# Altium PCB Pico-CRSF.PcbDoc
Units mil, origin at the board's own origin, x right, y up, seen from the top; angles counter-clockwise.
Board outline 1968.5 x 1968.5 mil, 2 copper layers (Top Layer, Bottom Layer), stack 38.189 mil thick; 44 components, 35 nets, 174 pads, 29 vias.
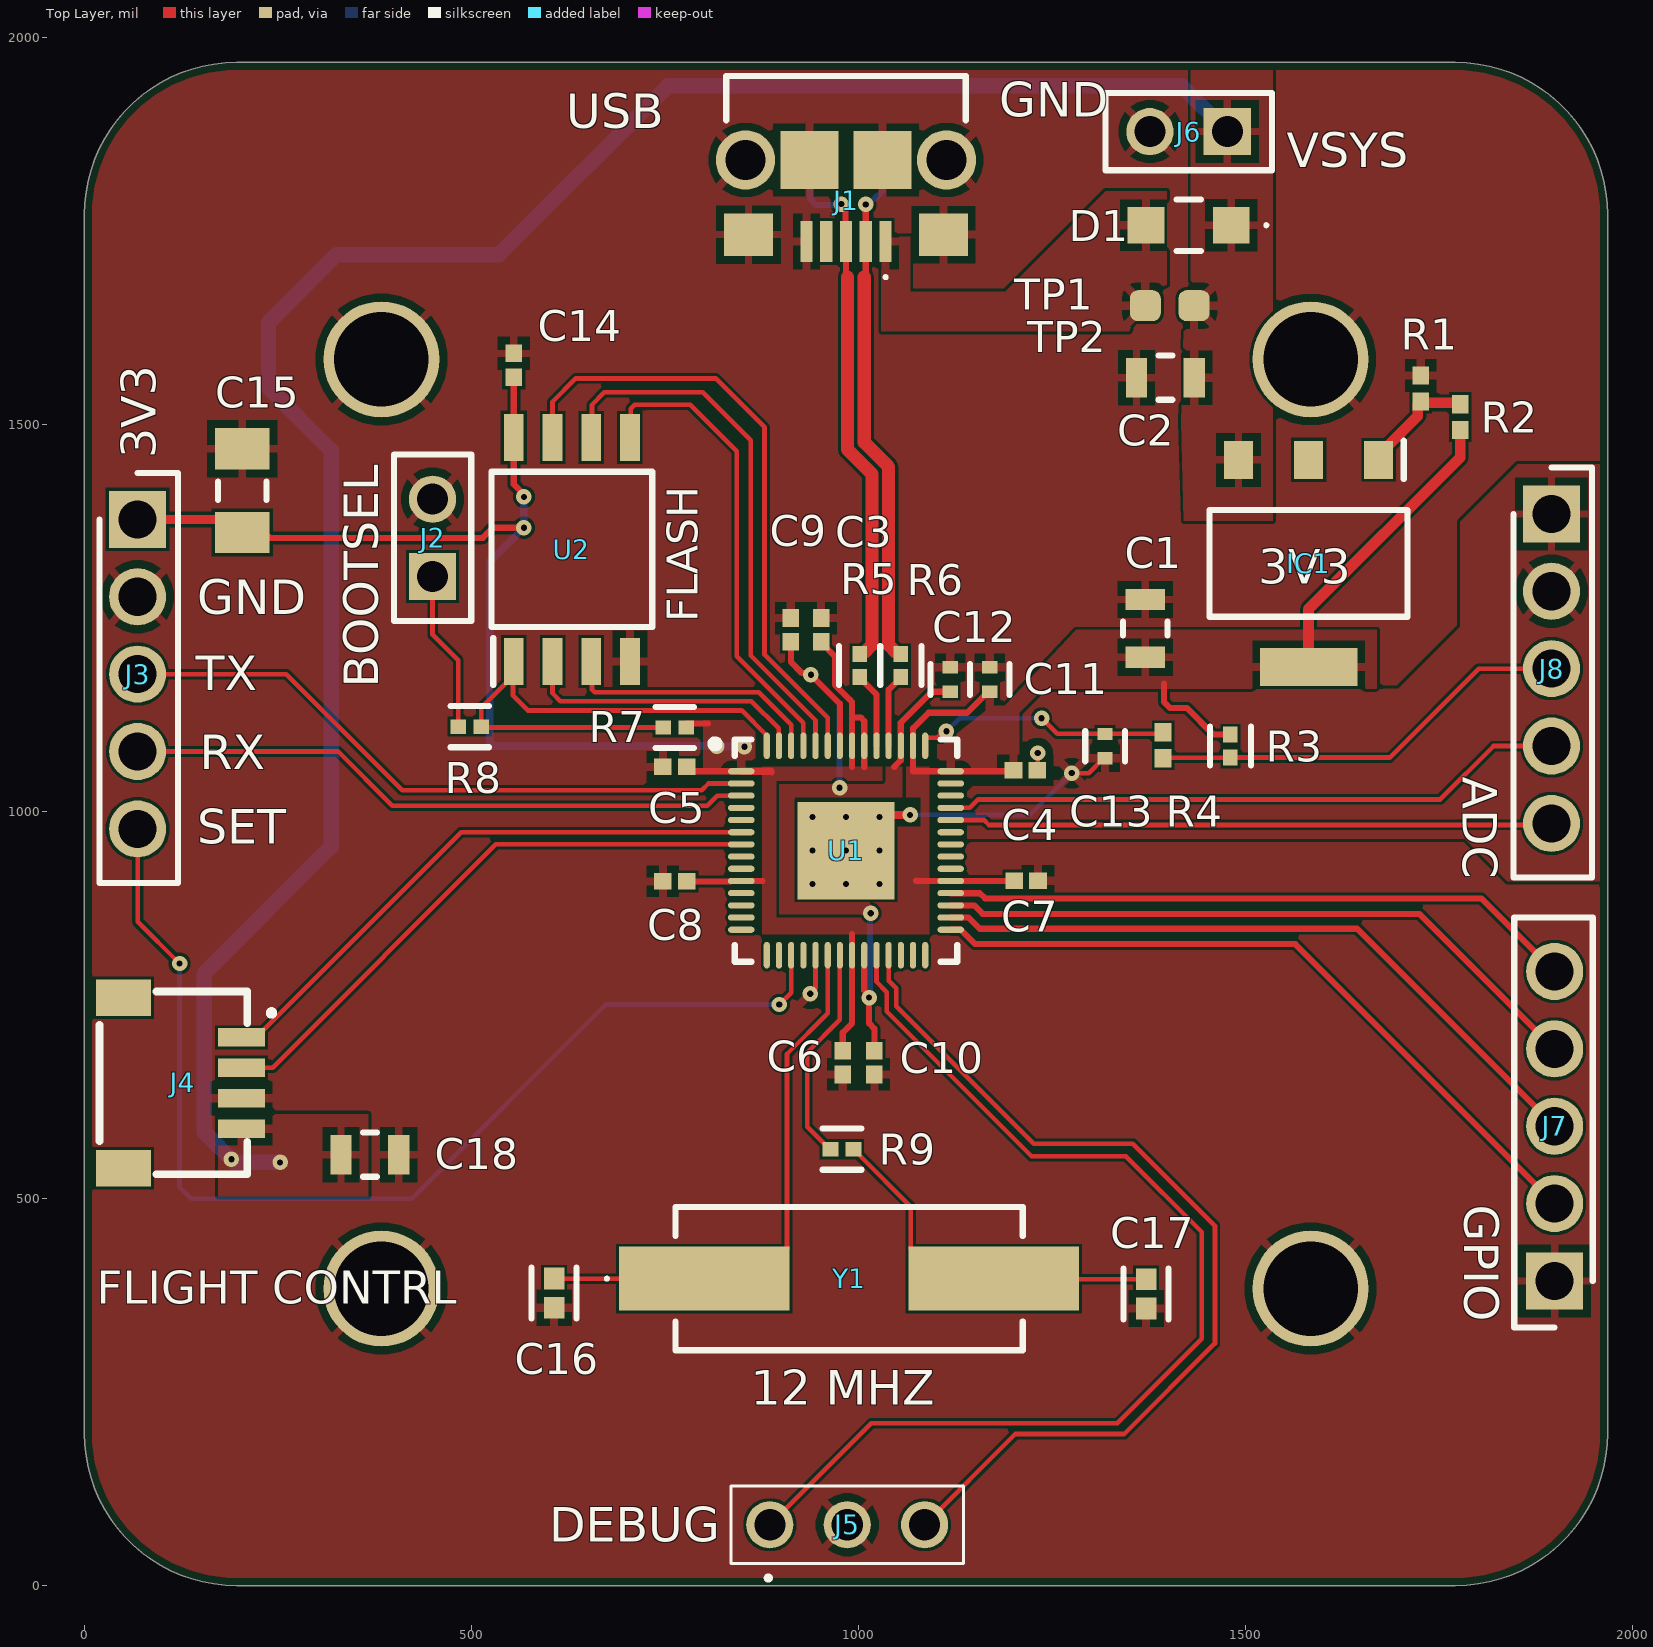
[diagram p0: Top Layer view]
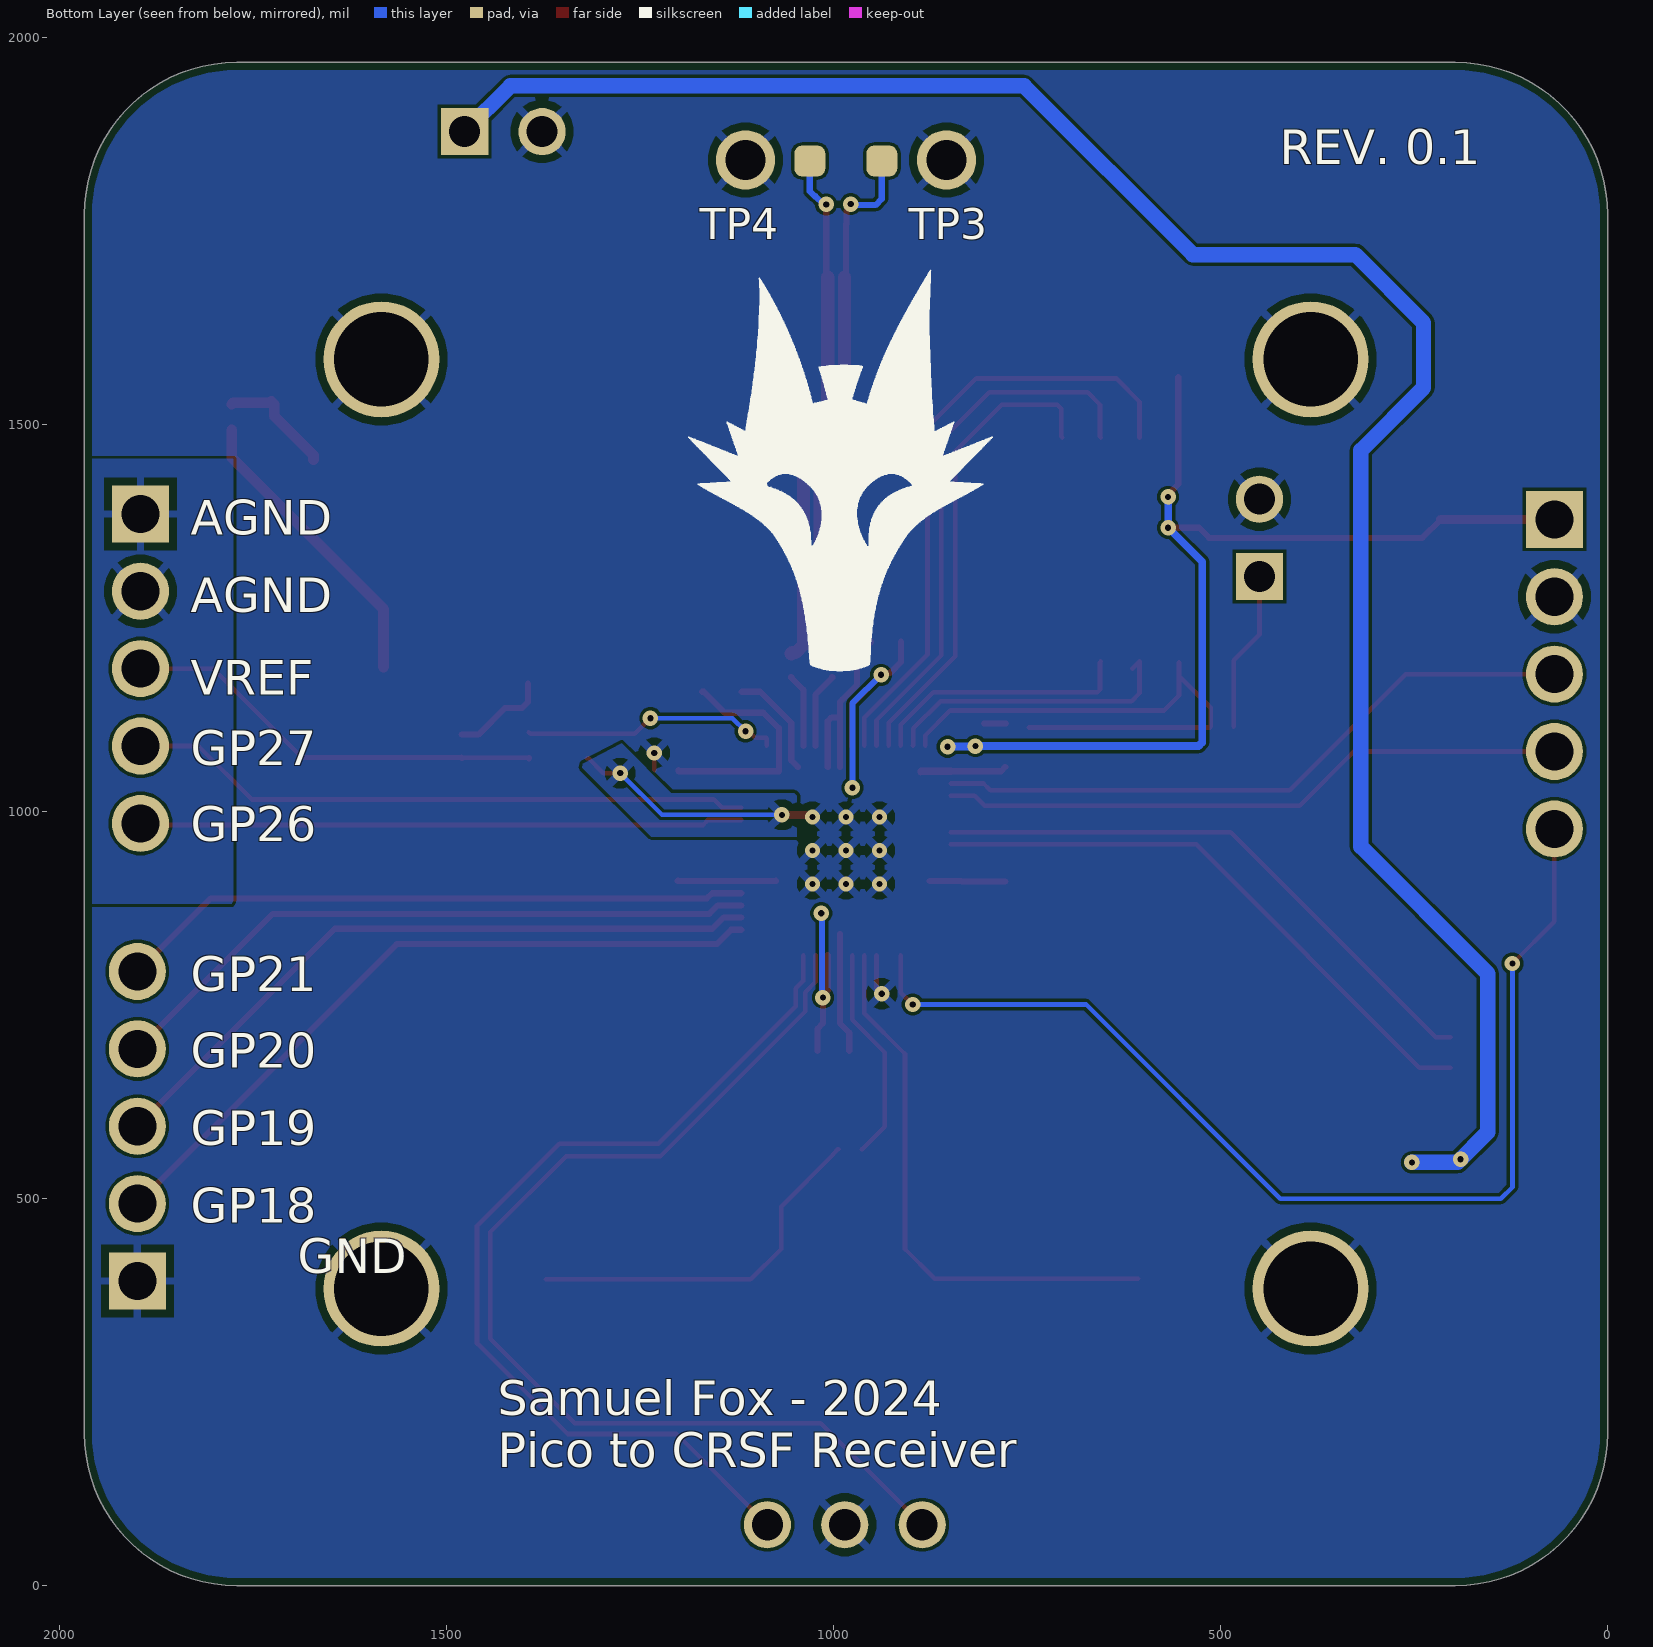
[diagram p1: Bottom Layer view, seen from below]
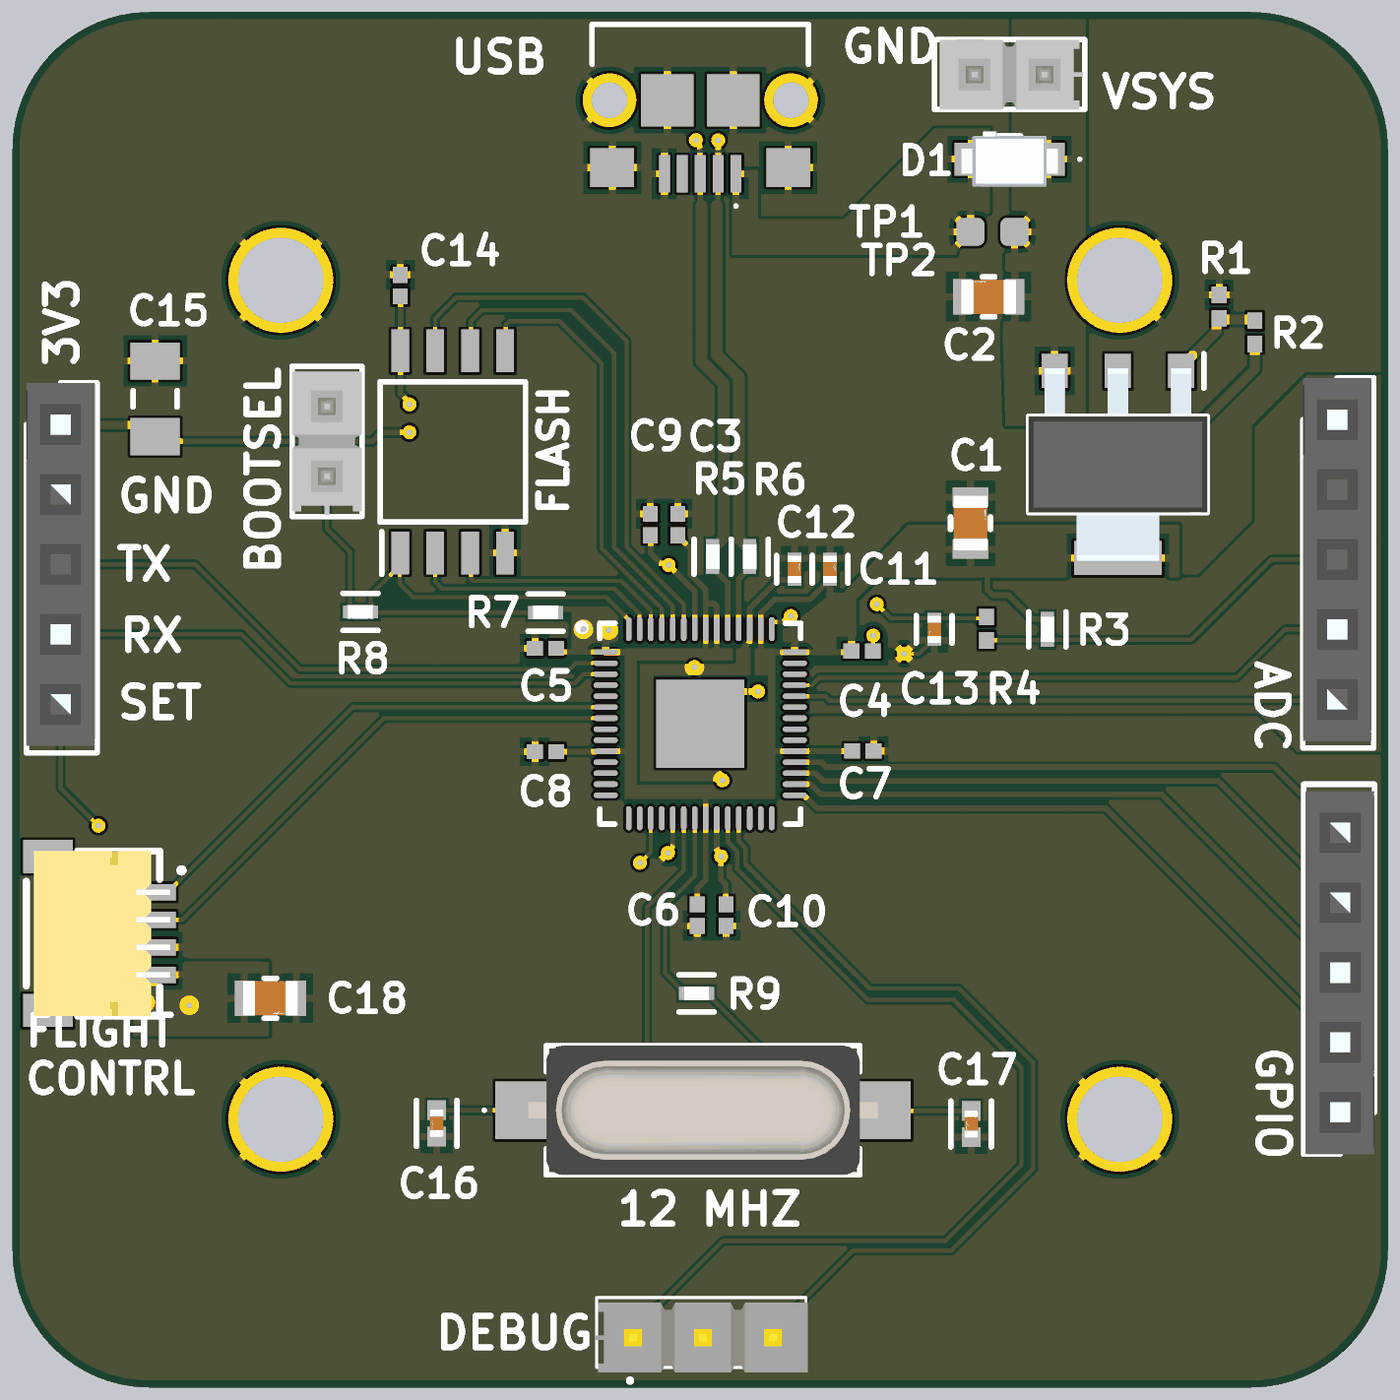
[diagram p2: 3D render of the assembled board from above, using the file's embedded part models]

## Layer stack, top to bottom
Top Solder: solder mask 0.4, Solder Resist, Dk 3.8
Top Layer: signal copper 1.378
Dielectric 1: dielectric 35.433, FR-4, Dk 4.5
Bottom Layer: signal copper 1.378
Bottom Solder: solder mask 0.4, Solder Resist, Dk 3.8

## Board outline
0,196.85 0,1771.65 cw(c196.85,1771.65) 196.85,1968.5 1771.65,1968.5 cw(c1771.65,1771.65) 1968.5,1771.65 1968.5,196.85 cw(c1771.65,196.85) 1771.65,0 196.85,0 cw(c196.85,196.85)

## Design rules (kind name [scope] priority, off if disabled: settings)
BoardOutlineClearance BoardOutlineClearance_1 [All] p1: gap=10 ignorepadtopadclearanceinfootprint=FALSE except(0: Arc-SplitContinuation Track-SplitContinuation SMDPad-SplitContinuation THPad-SplitContinuation Via-SplitContinuation Fill-SplitContinuation Poly-SplitContinuation Region-SplitContinuation Text-SplitContinuation)
Clearance Clearance_1 [OnMid vs OnMid] p1: gap=4 ignorepadtopadclearanceinfootprint=FALSE except(5: Arc-Arc Arc-Track Arc-SMDPad Arc-Text Track-Track Track-SMDPad Track-Text SMDPad-SMDPad SMDPad-Text Text-Text; 8: Arc-Via Track-Via SMDPad-Via THPad-Via Via-Via Via-Text; 10: Arc-Hole Track-Hole SMDPad-Hole THPad-Hole Via-Hole Fill-Hole Poly-Hole Region-Hole Text-Hole Hole-Hole; 15: Arc-THPad Track-THPad SMDPad-THPad THPad-Text; 20: THPad-THPad) sourcerule=45 cellrowname=All cellrowtype=0 cellcolname=All cellcoltype=0 innerlayers=TRUE
Clearance Clearance_2 [(ExistsOnLayer('Top Layer') Or ExistsOnLayer('Bottom Layer')) vs (ExistsOnLayer('Top Layer') Or ExistsOnLayer('Bottom Layer'))] p2: gap=4 ignorepadtopadclearanceinfootprint=FALSE except(5: Arc-Arc Arc-Track Arc-SMDPad Arc-Text Track-Track Track-SMDPad Track-Text SMDPad-SMDPad SMDPad-Text Text-Text; 8: Arc-Via Track-Via SMDPad-Via THPad-Via Via-Via Via-Text; 10: Arc-Hole Track-Hole SMDPad-Hole THPad-Hole Via-Hole Fill-Hole Poly-Hole Region-Hole Text-Hole Hole-Hole; 15: Arc-THPad Track-THPad SMDPad-THPad THPad-Text; 20: THPad-THPad) sourcerule=45 cellrowname=All cellrowtype=0 cellcolname=All cellcoltype=0 outerlayers=TRUE
Clearance [All] p3: gap=10 ignorepadtopadclearanceinfootprint=FALSE ismatrix=TRUE
DiffPairsRouting DifferentialPairsRouting_1 [InDifferentialPairClass('USB2.0')] p1: maxlimit=5 minlimit=5 mostfreqgap=5 toplayer_minwidth=16.87 toplayer_maxwidth=16.87 toplayer_prefwidth=16.87 bottomlayer_minwidth=16.87 bottomlayer_maxwidth=16.87 bottomlayer_prefwidth=16.87 impedanceprofiledriven=TRUE impedanceprofileid={F9BF6038-C2D3-4E47-A8B5-E0949A0A70E1} impedanceprofilevalue=90.000000 maxuncoupledlength=500
DiffPairsRouting "Schematic Differential Pairs Routing" [InDifferentialPairClass('All Differential Pairs')] p2: maxlimit=10 minlimit=5 mostfreqgap=5 toplayer_minwidth=5 toplayer_maxwidth=20 toplayer_prefwidth=15 bottomlayer_minwidth=5 bottomlayer_maxwidth=20 bottomlayer_prefwidth=15 maxuncoupledlength=500
DiffPairsRouting [All] p3: maxlimit=10 minlimit=5 mostfreqgap=5 toplayer_minwidth=5 toplayer_maxwidth=20 toplayer_prefwidth=15 bottomlayer_minwidth=5 bottomlayer_maxwidth=20 bottomlayer_prefwidth=15 maxuncoupledlength=500
HoleSize [All] p1: absolutevalues=TRUE maxlimit=248 minlimit=8 maxpercent=80.000 minpercent=20.000
HoleToHoleClearance [All] p1: gap=16 allowstackedmicrovias=TRUE
MinimumAnnularRing MinimumAnnularRing_1 [All] p1: minimumring=6
MinimumSolderMaskSliver [All] p1: minsoldermaskwidth=4
PolygonConnect PolygonConnectStyle_1 [InNetClass('UNREG-PWR')] p1: thpad.connectstyle=Relief thpad.reliefconductorwidth=10 thpad.reliefentries=4 thpad.polygonreliefangle="90 Angle" thpad.airgapwidth=10 thpad.conductorbypadedge=TRUE thpad.mindistance=15 thpad.enablemindistance=FALSE smdpad.connectstyle=Relief smdpad.reliefconductorwidth=10 smdpad.reliefentries=4 smdpad.polygonreliefangle="90 Angle" smdpad.airgapwidth=10 smdpad.conductorbypadedge=TRUE smdpad.mindistance=15 smdpad.enablemindistance=FALSE via.connectstyle=Direct via.reliefconductorwidth=10 via.reliefentries=4 via.polygonreliefangle="90 Angle" via.airgapwidth=10 via.conductorbypadedge=TRUE via.mindistance=15 via.enablemindistance=FALSE
PolygonConnect PolygonConnectStyle_2 [InNetClass('REG-PWR')] p2: thpad.connectstyle=Relief thpad.reliefconductorwidth=10 thpad.reliefentries=4 thpad.polygonreliefangle="90 Angle" thpad.airgapwidth=10 thpad.conductorbypadedge=TRUE thpad.mindistance=15 thpad.enablemindistance=FALSE smdpad.connectstyle=Relief smdpad.reliefconductorwidth=10 smdpad.reliefentries=4 smdpad.polygonreliefangle="90 Angle" smdpad.airgapwidth=10 smdpad.conductorbypadedge=TRUE smdpad.mindistance=15 smdpad.enablemindistance=FALSE via.connectstyle=Direct via.reliefconductorwidth=10 via.reliefentries=4 via.polygonreliefangle="90 Angle" via.airgapwidth=10 via.conductorbypadedge=TRUE via.mindistance=15 via.enablemindistance=FALSE
PolygonConnect [All] p3: connectstyle=Relief reliefconductorwidth=10 reliefentries=4 polygonreliefangle="90 Angle" conductorbypadedge=TRUE mindistance=15 enablemindistance=FALSE airgapwidth=10
RoomDefinition Pico-CRSF [InComponentClass('Pico-CRSF')] p1: confinementstyle=ConfineOut formatcopy=TRUE lockcomponents=FALSE outline 2100,-82 6319,-82 6319,1939 2100,1939
RoutingVias [All] p1: holewidth=8 width=20 viastyle="Through Hole" minholewidth=8 minwidth=20 maxholewidth=8 maxwidth=20
SilkToSolderMaskClearance [IsPad] p1: minsilkscreentomaskgap=6 clearancetoexposedcopper=TRUE
SolderMaskExpansion [All] p1: expansion=4 istentingtop=FALSE
Width "Schematic Width Constraint_1" [InNetClass('UNREG-PWR')] p1: maxlimit=20 minlimit=5 preferedwidth=6 minimp=50.000000 maximp=50.000000 favimp=50.000000
Width "Schematic Width Constraint" [InNetClass('REG-PWR')] p2: maxlimit=20 minlimit=5 preferedwidth=6 minimp=50.000000 maximp=50.000000 favimp=50.000000
Width [All] p3: maxlimit=20 minlimit=5 preferedwidth=6 minimp=50.000000 maximp=50.000000 favimp=50.000000
25 further rules are at their usual default settings.

## Classes and differential pairs
differential pair class USB2.0: D_USB-D
net class UNREG-PWR: VBUS VSYS
net class REG-PWR: 1V1_REG 3V3_REG
component class Pico-CRSF: C2 C3 C4 C5 C6 C7 C8 C9 C10 C11 C12 C13 C14 C15 C16 C17 C18 D1 IC1 J1 J2 J3 J4 J5 J6 J7 J8 R1 R3 R4 R5 R6 R7 R8 R9 TP1 TP2 TP3 TP4 Y1
differential pair D_USB-D: +USB-D_P -USB-D_N

## Components (designator, comment, footprint, x,y, rotation, side; value= is the part's Value field where it differs from the comment)
C1 "GRT21BR60J476ME13L" FP-GRT21B-0_2-MFG 1371,1237 r90 top value=47µF
C2 "GRT21BR60J476ME13L" FP-GRT21B-0_2-MFG 1397,1561 r180 top value=47µF
C3 "04026D104KAT2A" CAPC1005X56X25LL10T15 952,1235 r90 top value=0.1µF
C4 "04026D104KAT2A" CAPC1005X56X25LL10T15 1216,1054 r0 top value=0.1µF
C5 "04026D104KAT2A" CAPC1005X56X25LL10T15 763,1058 r180 top value=0.1µF
C6 "04026D104KAT2A" CAPC1005X56X25LL10T15 980,676 r270 top value=0.1µF
C7 "04026D104KAT2A" CAPC1005X56X25LL10T15 1217,911 r0 top value=0.1µF
C8 "04026D104KAT2A" CAPC1005X56X25LL10T15 763,910 r180 top value=0.1µF
C9 "04026D104KAT2A" CAPC1005X56X25LL10T15 913,1235 r90 top value=0.1µF
C10 "04026D104KAT2A" CAPC1005X56X25LL10T15 1021,676 r270 top value=0.1µF
C11 "GRM155D80J225ME95D" FP-GRM155-0_05-MFG 1170,1171 r90 top value=2.2µF
C12 "GRM155D80J225ME95D" FP-GRM155-0_05-MFG 1119,1171 r90 top value=2.2µF
C13 "GRM155D80J225ME95D" FP-GRM155-0_05-MFG 1319,1085 r270 top value=2.2µF
C14 "04026D104KAT2A" CAPC1005X56X25LL10T15 555,1577 r90 top value=0.1uF
C15 "CL31A107MQHNNNE" CAPC3216X16N 204,1415 r90 top value=100µF
C16 "GCM1555C1H300JA16D" FP-GCM155-0_05-IPC_A 607,378 r270 top value=30pF
C17 "GCM1555C1H300JA16D" FP-GCM155-0_05-IPC_A 1372,377 r270 top value=30pF
C18 "GRT21BR60J476ME13L" FP-GRT21B-0_2-MFG 369,557 r0 top value=47µF
D1 "PMEG2010ER,115" PMEG2010ER115 1427,1758 r180 top
IC1 "NCP1117ISTAT3G" SOT230P700X180-4N 1582,1321 r270 top
J1 "10118193-0001LF" 101181930001LF 984.25,1830.71 r180 top locked
J2 "TSW-102-26-G-S" SMTC-TSW-102-26-XX-S 450,1304 r90 top
J3 "2212S-05SG-85" RHDR5W74P0X254_1X5_1320X250X850P 68.9,1377.95 r270 top
J4 "SM04B-SRSS-TB_LF__SN_" SM04B-SRSS-TB(LFSN) 19.68,767.72 r270 top
J5 "TSW-103-26-G-S" TSW-103-XX-YY-S 885.83,78.74 r0 top
J6 "TSW-102-26-G-S" SMTC-TSW-102-26-XX-S 1477,1879 r180 top
J7 "2212S-05SG-85" RHDR5W74P0X254_1X5_1320X250X850P 1900,393.7 r90 top
J8 "2212S-05SG-85" RHDR5W74P0X254_1X5_1320X250X850P 1896,1385 r270 top
R1 "RC0402JR-07300RL" RESC1005X40X25NL05T10 1727,1547 r270 top value=330R
R2 "RC0402FR-07180RL" RESC1005X40X25NL05T10 1778,1510 r270 top value=200R
R3 "CR0402-FX-2000GLF" FP-CR0402-IPC_C 1481,1085 r270 top value=200R
R4 "RC0402FR-071R" RESC1005X40X25NL05T10 1394,1086 r90 top value=1.1R
R5 "CR0402-FX-27R0GLF" FP-CR0402-IPC_C 1002,1189 r270 top value=27R
R6 "CR0402-FX-27R0GLF" FP-CR0402-IPC_C 1055,1189 r270 top value=27R
R7 "CR0402AFX-1001GAS" FP-CR0402-IPC_C 763,1109 r0 top value=DNF
R8 "CR0402AFX-1001GAS" FP-CR0402-IPC_C 498,1110 r0 top value=1K
R9 "CR0402AFX-1001GAS" FP-CR0402-IPC_C 979,564 r180 top value=1K
TP1 "TestPoint" TestPoint-Footprint-1 1371,1654 r90 top
TP2 "TestPoint" TestPoint-Footprint-1 1434,1654 r90 top
TP3 "TestPoint" TestPoint-Footprint-1 938,1841 r90 bottom
TP4 "TestPoint" TestPoint-Footprint-1 1031,1841 r90 bottom
U1 "RP2040CT" QFN40P700X700X90_HS-57N 984.25,950 r0 top
U2 "S25FL128LAGMFI010" SOIC127P800X216-8N 630,1339 r90 top
Y1 "ABLS-12.000MHZ-B4-T" ABLS 988.25,396.7 r0 top

## Footprints (in the part's own frame and the unit in brackets; to place one, negate y for a bottom-side part, rotate by r counter-clockwise, add the part's x,y. Pads: shape width x height; smd on the part's side, far side on the other; paste and mask are expansions set on the pad)
101181930001LF [mm]
  rect 0.4x1.35 smd: 1(-1.3,2.38) 2(-0.65,2.38) 3(0,2.38) 4(0.65,2.38) 5(1.3,2.38)
  round 1.95 hole 1.3: MH1(-3.3,-0.295) MH2(3.3,-0.295)
  rect 1.6x1.4 smd: MP1(-3.2,2.155) MP2(3.2,2.155)
  rect 1.9x1.9 smd: MP3(-1.2,-0.295) MP4(1.2,-0.295)
  silkscreen extent -3.93,-3.06 3.93,3.6, body extent 94.07,-0.43 101.93,3.18, height 5.91
ABLS [mm]
  rect 5.6x2.1 smd: 1(-4.75,0) 2(4.75,0)
  silkscreen extent -8,-2.35 5.7,2.35, body extent -6.35,-2.35 6.35,2.35, height 4.2
CAPC1005X56X25LL10T15 [mm] "Chip Capacitor, 2-Leads, Body 1.00x0.50mm, IPC High Density"
  rect 0.58x0.54 smd: 1(-0.39,0) 2(0.39,0)
  body extent -0.55,-0.3 0.55,0.3, height 0.56
CAPC3216X16N [mm] "Chip Capacitor, 2-Leads, Body 3.20x1.60mm, IPC Medium Density"
  rect 1.35x1.8 smd: 1(-1.375,0) 2(1.375,0)
  silkscreen extent -0.3,-0.8 0.3,0.8, body extent -1.7,-0.9 1.7,0.9, height 1.6
FP-CR0402-IPC_C [mil]
  rect 20.29x18.6 smd paste+0 mask+0: 1(-14.9,0) 2(14.9,0)
  silkscreen extent -25,-27 25,27, body extent -29,-15 29,15, height 10
FP-GCM155-0_05-IPC_A [mil]
  rect 28.16x26.48 smd paste+0 mask+0: 1(-18.84,0) 2(18.84,0)
  silkscreen extent -33,-29 33,29, body extent -41,-21 41,21, height 10
FP-GRM155-0_05-MFG [mm]
  rect 0.4x0.5 smd paste+0 mask+0: 1(-0.4,0) 2(0.4,0)
  silkscreen extent -0.5,-0.65 0.5,0.65, body extent -0.7,-0.38 0.7,0.38, height 0.25
FP-GRT21B-0_2-MFG [mm]
  rect 0.7x1.3 smd paste+0 mask+0: 1(-0.95,0) 2(0.95,0)
  silkscreen extent -0.23,-0.72 0.23,0.72, body extent -1.4,-0.82 1.4,0.82, height 0.25
PMEG2010ER115 [mm]
  rect 1.2x1.2 smd: 1(-1.4,0) 2(1.4,0)
  silkscreen extent -2.6,-0.85 0.4,0.85, body extent -1.75,-1 1.75,1, height 1.07
QFN40P700X700X90_HS-57N [mm] "QFN, 56-Leads, Body 7.00x7.00mm, Pitch 0.40mm, Thermal Pad 3.20x3.20mm, IPC Medium Density"
  oval 0.875x0.2 smd: 1(-3.437,2.6) 2(-3.437,2.2) 3(-3.437,1.8) 4(-3.437,1.4) 5(-3.437,1) 6(-3.437,0.6) 7(-3.437,0.2) 8(-3.437,-0.2) 9(-3.437,-0.6) 10(-3.437,-1) 11(-3.437,-1.4) 12(-3.437,-1.8) 13(-3.437,-2.2) 14(-3.437,-2.6) 29(3.438,-2.6) 30(3.438,-2.2) 31(3.438,-1.8) 32(3.438,-1.4) 33(3.438,-1) 34(3.438,-0.6) 35(3.438,-0.2) 36(3.438,0.2) 37(3.438,0.6) 38(3.438,1) 39(3.438,1.4) 40(3.438,1.8) 41(3.438,2.2) 42(3.438,2.6)
  oval 0.2x0.875 smd: 15(-2.6,-3.438) 16(-2.2,-3.438) 17(-1.8,-3.438) 18(-1.4,-3.438) 19(-1,-3.438) 20(-0.6,-3.438) 21(-0.2,-3.438) 22(0.2,-3.438) 23(0.6,-3.438) 24(1,-3.438) 25(1.4,-3.438) 26(1.8,-3.438) 27(2.2,-3.438) 28(2.6,-3.438) 43(2.6,3.437) 44(2.2,3.437) 45(1.8,3.437) 46(1.4,3.437) 47(1,3.437) 48(0.6,3.437) 49(0.2,3.437) 50(-0.2,3.437) 51(-0.6,3.437) 52(-1,3.437) 53(-1.4,3.437) 54(-1.8,3.437) 55(-2.2,3.437) 56(-2.6,3.437)
  rect 3.2x3.2 smd: 57(0,0)
  silkscreen extent -4.42,-3.65 3.65,3.65, body extent -3.5,-3.5 3.5,3.5, height 0.9
RESC1005X40X25NL05T10 [mm] "Chip Resistor, 2-Leads, Body 1.00x0.50mm, IPC Medium Density"
  rect 0.6x0.55 smd: 1(-0.425,0) 2(0.425,0)
  body extent -0.53,-0.27 0.53,0.28, height 0.4
RHDR5W74P0X254_1X5_1320X250X850P [mm]
  rect 1.875x1.875 hole 1.25: 1(0,0)
  round 1.875 hole 1.25: 2(2.54,0) 3(5.08,0) 4(7.62,0) 5(10.16,0)
  silkscreen extent -1.52,-1.25 11.93,1.33, body extent -1.52,-1.25 11.68,1.25, height 8.5
SM04B-SRSS-TB(LFSN) [mm]
  rect 0.6x1.55 smd: 1(1.5,4.661) 2(2.5,4.661) 3(3.5,4.661) 4(4.5,4.661)
  rect 1.2x1.8 smd: 5(0.2,0.786) 6(5.8,0.786)
  silkscreen extent 0,0 6,5.7, body extent 0,0.28 6,5.23, height 2.97
SMTC-TSW-102-26-XX-S [mm] ".025 SQ Post Terminal Strip Assembly, 1x2 Pins, Vertical, 2.54mm Pitch, Male"
  rect 1.55x1.55 hole 1.02: 1(0,0)
  round 1.55 hole 1.02: 2(2.54,0)
  silkscreen extent -1.46,-1.27 4,1.27, body extent -1.4,-1.27 3.81,1.27, height 8.38
SOIC127P800X216-8N [mm]
  rect 1.55x0.65 smd: 1(-3.675,1.905) 2(-3.675,0.635) 3(-3.675,-0.635) 4(-3.675,-1.905) 5(3.675,-1.905) 6(3.675,-0.635) 7(3.675,0.635) 8(3.675,1.905)
  silkscreen extent -4.45,-2.64 2.55,2.64
SOT230P700X180-4N [mm]
  rect 1.25x0.95 smd: 1(-3.4,2.3) 2(-3.4,0) 3(-3.4,-2.3)
  rect 1.25x3.2 smd: 4(3.4,0)
  silkscreen extent -4.03,-3.25 1.75,3.25, body extent -3.5,-3.25 3.5,3.25, height 1.8
TestPoint-Footprint-1 [mil]
  rrect50% 40x40 smd: 1(0,0)
TSW-103-XX-YY-S [mm]
  round 1.55 hole 1.02: 1(0,0) 2(2.54,0) 3(5.08,0)
  silkscreen extent -1.27,-1.8 6.35,1.27, body extent -1.34,-1.46 6.41,1.08, height 5.21

## Part data
C1 C2 C18: library part CMP-001-00084-1, "Ceramic Capacitor, Multilayer, Ceramic, 6.3V, 20% +Tol, 20% -Tol, X5R, 15% TC, 47uF, Surface Mount, 0805", Capacitor Type=Ceramic, Case/Package=0805, Max Operating Temperature=85°C, Min Operating Temperature=-55°C, Mounting Technology="Surface Mount", Pins=2, RoHS Compliant=Yes
C3 C4 C5 C6 C7 C8 C9 C10 C14: library part CMP-001-00085-1, "Ceramic Capacitor, Multilayer, Ceramic, 6.3V, 10% +Tol, 10% -Tol, X5R, 15% TC, 0.1uF, Surface Mount, 0402", Capacitor Type=Ceramic, Case/Package=0402, Max Operating Temperature=85°C, Min Operating Temperature=-55°C, Mounting Technology="Surface Mount", Pins=2, RoHS Compliant=Yes
C11 C12 C13: library part CMP-001-00086-1, "Ceramic Capacitor, Multilayer, Ceramic, 6.3V, 20% +Tol, 20% -Tol, X6T, -33/+22% TC, 2.2uF, Surface Mount, 0402", Capacitor Type=Ceramic, Case/Package=0402, Max Operating Temperature=105°C, Min Operating Temperature=-55°C, Mounting Technology="Surface Mount", Pins=2, RoHS Compliant=Yes
C15: library part CMP-001-00089-1, "Ceramic Capacitor, Multilayer, Ceramic, 6.3V, 20% +Tol, 20% -Tol, X5R, 15% TC, 100uF, Surface Mount, 1206", Capacitor Type=Ceramic, Case/Package=1206, Max Operating Temperature=85°C, Min Operating Temperature=-55°C, Mounting Technology="Surface Mount", Pins=2, RoHS Compliant=Yes
C16 C17: library part CMP-001-00088-1, "Ceramic Capacitor, Multilayer, Ceramic, 50V, 5% +Tol, 5% -Tol, C0G, 30ppm/Cel TC, 0.00003uF, Surface Mount, 0402", Capacitor Type=Ceramic, Case/Package=0402, Max Operating Temperature=125°C, Min Operating Temperature=-55°C, Mounting Technology="Surface Mount", Pins=2, RoHS Compliant=Yes
D1: "Schottky Diode", Manufacturer_Name=Nexperia, Mouser Part Number=771-PMEG2010ER115, Arrow Part Number=PMEG2010ER,115, Arrow Price/Stock=https://www.arrow.com/en/products/pmeg2010er115/nexperia?region=nac, Datasheet Link=https://assets.nexperia.com/documents/data-sheet/PMEG2010ER.pdf, Height=1.1mm, Manufacturer_Part_Number=PMEG2010ER,115, Mouser Price/Stock=https://www.mouser.co.uk/ProductDetail/Nexperia/PMEG2010ER115?qs=LMSg3oBIm%2FjLN28PGE8ULg%3D%3D
IC1: "Integrated Circuit", Manufacturer_Name=onsemi, Mouser Part Number=863-NCP1117ISTAT3G, Datasheet Link=https://www.mouser.in/datasheet/2/308/NCP1117_D-2307187.pdf, Height=1.8mm, Manufacturer_Part_Number=NCP1117ISTAT3G, Mouser Price/Stock=https://www.mouser.co.uk/ProductDetail/onsemi/NCP1117ISTAT3G?qs=iLbezkQI%252Bsivw9bUuD01vA%3D%3D
J1: "Connector", Manufacturer_Name="Amphenol Communications Solutions", Datasheet Link=https://cdn.amphenol-cs.com/media/wysiwyg/files/drawing/10118193.pdf, Height=3.3mm, Manufacturer_Part_Number=10118193-0001LF
J2 J6: library part CMP-1024-00327-1, "0.025\" SQ Post Header, Through-hole, Vertical, -55 to 125 degC, 2.54 mm Pitch, 2-Pin, Male, RoHS", Manufacturer=Samtec, Temperature Range="-55 to 125 degC", ComponentLink1Description="Manufacturer URL", ComponentLink1URL=http://www.samtec.com, ComponentLink2Description=Datasheet, ComponentLink2URL=http://www.samtec.com/documents/webfiles/pdf/TSW_TH.PDF, ComponentLink3Description="Package Specification", ComponentLink3URL=http://www.samtec.com/documents/webfiles/cpdf/TSW-XXX-XX-XXX-X-XX-XXX-MKT.pdf, DatasheetVersion=F-214, Mounting Technology=Through-hole, Orientation=Vertical, PackageDescription=".025[0.64] SQ. Post Terminal Strip Assembly", PackageReference=TSW-102-26-XX-S, PackageVersion="DM, 8/1988", PartNumber=TSW-102-26-G-S, Pitch="2.54 mm", RoHS=True
J3 J7 J8: "Connector", Manufacturer_Name="Multicomp Pro", Datasheet Link=https://componentsearchengine.com/Datasheets/2/2212S-05SG-85.pdf, Height=8.5mm, Manufacturer_Part_Number=2212S-05SG-85
J4: "Connector", Arrow Part Number=SM04B-SRSS-TB(LF)(SN), Manufacturer_Name="JST (JAPAN SOLDERLESS TERMINALS)", Arrow Price/Stock=https://www.arrow.com/en/products/sm04b-srss-tb-lf-sn/jst-manufacturing?region=europe, Datasheet Link=http://www.jst-mfg.com/product/pdf/eng/eSH.pdf, Manufacturer_Part_Number=SM04B-SRSS-TB(LF)(SN)
J5: "Connector", Manufacturer_Name=SAMTEC, Datasheet Link=http://suddendocs.samtec.com/prints/tsw-xxx-xx-xxx-x-xx-xxx-mkt.pdf, Manufacturer_Part_Number=TSW-103-26-G-S
R1: library part CMP-009-00179-1, "Fixed Resistor, Metal Glaze/thick Film, 0.0625W, 300ohm, 50V, 5% +/-Tol, 100ppm/Cel, Surface Mount, 0402", Case/Package=0402, Max Operating Temperature=155°C, Min Operating Temperature=-55°C, Power=62.5mW, Tolerance=5%, Mounting Technology="Surface Mount", Pins=2, RoHS Compliant=Yes
R2: library part CMP-009-00178-1, "Fixed Resistor, Metal Glaze/thick Film, 0.0625W, 180ohm, 50V, 1% +/-Tol, 100ppm/Cel, Surface Mount, 0402", Case/Package=0402, Max Operating Temperature=155°C, Min Operating Temperature=-55°C, Power=62.5mW, Tolerance=1%, Mounting Technology="Surface Mount", Pins=2, RoHS Compliant=Yes
R3: library part CMP-009-00180-1, "Fixed Resistor, Metal Glaze/thick Film, 0.0625W, 200ohm, 50V, 1% +/-Tol, 100ppm/Cel, Surface Mount, 0402", Case/Package=0402, Max Operating Temperature=125°C, Min Operating Temperature=-55°C, Power=62.5mW, Tolerance=1%, Mounting Technology="Surface Mount", Pins=2, RoHS Compliant=Yes
R4: library part CMP-009-00181-1, "Fixed Resistor, Metal Glaze/thick Film, 0.0625W, 1.1ohm, 50V, 1% +/-Tol, 200ppm/Cel, Surface Mount, 0402", Case/Package=0402, Max Operating Temperature=155°C, Min Operating Temperature=-55°C, Power=62.5mW, Tolerance=1%, Mounting Technology="Surface Mount", Pins=2, RoHS Compliant=Yes
R5 R6: library part CMP-009-00182-1, "Fixed Resistor, Metal Glaze/thick Film, 0.0625W, 27ohm, 50V, 1% +/-Tol, 100ppm/Cel, Surface Mount, 0402", Case/Package=0402, Max Operating Temperature=125°C, Min Operating Temperature=-55°C, Power=62.5mW, Tolerance=1%, Mounting Technology="Surface Mount", Pins=2, RoHS Compliant=Yes
R7 R8 R9: library part CMP-009-00177-1, "Fixed Resistor, Metal Glaze/thick Film, 0.063W, 1000ohm, 50V, 1% +/-Tol, 100ppm/Cel, Surface Mount, 0402"
TP1 TP2 TP3 TP4: library part CMP-00030-00001-2, "Test point for circuit testing."
U1: library part CMP-020-00023-1, "RASPBERRY-PI RP2040CT", Case/Package=QFN-56, Clock Frequency=12MHz, Frequency=133MHz, Mounting Technology=SMD, Pins=56
U2: library part CMP-007-000000-1, "CYPRESS SEMICONDUCTOR - S25FL128LAGMFI010 - FLASH MEMORY, 128MBIT, 133MHZ, SOIC-8", Manufacturer_Name=Infineon, Datasheet Link=http://www.cypress.com/file/316171/download, Design Item ID=S25FL128LAGMFI010, Geometry.Height=2.16mm, Manufacturer_Part_Number=S25FL128LAGMFI010, Source=S25FL128LAGMFI010.SchLib
Y1: "Crystal or Oscillator", Manufacturer_Name=ABRACON, Mouser Part Number=815-ABLS-12.0M-T, Arrow Part Number=ABLS-12.000MHZ-B4-T, Arrow Price/Stock=https://www.arrow.com/en/products/abls-12.000mhz-b4-t/abracon?region=europe, Datasheet Link=https://abracon.com/Resonators/abls.pdf, Manufacturer_Part_Number=ABLS-12.000MHZ-B4-T, Mouser Price/Stock=https://www.mouser.co.uk/ProductDetail/ABRACON/ABLS-12.000MHZ-B4-T?qs=yTU0IcKoRlGSQ8ooxPPVnQ%3D%3D

## Free pads (board coordinates)
  round 150 hole 122.05: MH1(383.86,1584.65) MH2(1584.65,1584.65) MH3(1584.65,383.86) MH4(383.86,383.86)

## Via types
v1: diameter 20, hole 8, Top Layer to Bottom Layer, 20 vias
v2: diameter 19.68, hole 7.87, Top Layer to Bottom Layer, 9 vias

## Nets (pads, with @x,y where several pads share a name; then routed paths per layer and width w, separated by ;. In a path a pad name is that pad's centre, name@x,y a point inside that pad or via, vN(x,y) a via of type N, cw(c..) or ccw(c..) an arc to the next point about the centre after c; other vN are vias at no path point)
1V1_REG: C9.1 C10.1 C12.1 U1.23 U1.45 U1.50 | length 707.2
  Top Layer w8: C9.1 913,1193.69 927.39,1179.3 936.7,1179.3 976.38,1139.62 U1.50 ; U1.23 1007.87,769.5 1014.13,763.25 v1(1014.13,760) 1014,759.87 1014,726.8 1021,719.8 C10.1 ; 1046.61,1058 1055.06,1066.45 U1.45 U1.45 1055.12,1115.12 1095.25,1155.25 C12.1
  Bottom Layer w8: v1(939,1177) 976,1140 v1(976,1030.99) ; v1(1014.13,760) 1015.13,761 1015.13,867.88 v1(1016.25,869.01)
3V3_REG: C1.1 C3.1 C4.1 C5.1 C6.1 C7.1 C8.1 C11.1 C14.1 C15.1 IC1.4 J3.1 R2.2 R3.1 R7.2 U1.1 U1.10 U1.22 U1.33 U1.42 U1.44 U1.48 U1.49 U2.8 | length 2939.5
  Top Layer w8: J3.1 J3.1@69.25,1377.6 ; C15.1@215.81,1377.6 239.41,1354 515,1354 528,1367 v1(568,1367) ; C14.1 U2.8 555,1423.25 568,1410.25 v1(568,1407) ; R7.2@777.9,1114 806,1114 ; C8.1 835.13,910 835.76,910.63 U1.10 876.41,910.63 ; C5.1 783.93,1052.43 U1.1 U1.1 ; 886.64,1052.36 888,1051 ; C3.1 952,1218.86 970,1200.86 970,1164.38 989.38,1145.01 989.38,1144.56 992.13,1141.82 992.13,1122 ; C6.1 980,714.77 992.13,726.9 U1.22 992.13,842.16 ; 992.13,1057.84 U1.49 992.13,1122 ; 1007.87,1057.84 U1.48 1007.87,1117.31 1003.19,1122 992.13,1122 ; 1075,911 1075,910.63 U1.33 1201.65,910.63 C7.1 ; C11.1 1168.03,1155.25 1140.78,1128 1091,1128 1070.93,1107.93 1070.93,1085.4 U1.44 1070.87,1052.36 U1.42 1200.65,1052.36 C4.1 ; 1395,1166 1395,1142 1403,1134 1425,1134 1459.1,1099.9 R3.1
  Top Layer w10: U1.1 886.64,1052.36
  Top Layer w12: J3.1@69.25,1377.6 C15.1@215.81,1377.6
  Top Layer w14: IC1.4 1582,1262 1778,1458 R2.2
  Bottom Layer w10: v1(568,1407) v1(568,1367) 524,1323 524,1089.69 528.69,1085 v1(817,1085) 817.5,1084.5 852.5,1084.5 v1(853,1084)
ADC_AVDD: C13.1 R4.2 U1.43 | length 336.9
  Top Layer w6: U1.43 1086.61,1094.76 1087.48,1095.62 1101.83,1095.62 1110.21,1104 v1(1114,1104) ; v1(1237,1121) 1257.25,1100.75 1392.02,1100.75 R4.2
  Bottom Layer w6: v1(1114,1104) 1131,1121 v1(1237,1121)
ADC_VREF: J8.3 R3.2 R4.1 | length 549.9
  Top Layer w6: R4.1@1394.41,1069.68 R3.2@1480.59,1069.68 ; R3.2 1687.1,1070.1 1802,1185 J8.3
  Top Layer w8: R4.1 R4.1@1394.41,1069.68 ; R3.2@1480.59,1069.68 R3.2
ADJ_REF: IC1.1 R1.2 R2.1 | length 150.4
  Top Layer w14: IC1.1 1672.55,1460.76 1723.17,1511.39 1723.17,1526.44 R1.2 1728.77,1528.5 1776.23,1528.5 R2.1
CRSF_RX: J4.2 U1.7 | length 765.3
  Top Layer w6: J4.2 243.29,669.29 531.87,957.87 U1.7
CRSF_TX: J4.1 U1.6 | length 755.5
  Top Layer w6: J4.1 221.89,708.66 486.85,973.62 U1.6
GND: C1.2 C2.2 C3.2 C4.2 C5.2 C6.2 C7.2 C8.2 C9.2 C10.2 C11.2 C12.2 C13.2 C14.2 C15.2 C16.2 C17.2 C18.2 J1.5 J1.MH1 J1.MH2 J1.MP1 J1.MP2 J1.MP3 J1.MP4 J2.2 J3.2 J4.3 J5.2 J6.2 J7.1 J8.1 J8.2 pad.MH1 pad.MH2 pad.MH3 pad.MH4 R1.1 U1.19 U1.57 U2.4 | length 397.7
  Top Layer w6: v1(938,765) 944.88,771.88 U1.19 ; C4.2 1232,1054.65 v1(1232,1076) ; v1(1276,1050) 1297.78,1050 1317.03,1069.25 C13.2
  Top Layer w10: v2(1027.56,993.31) 1030.25,996 v1(1067,996)
  Bottom Layer w6: v1(1067,996) 1222,996 v1(1276,1050)
  other v2: 940.95,906.69 984.25,906.69 1027.56,906.69 940.95,950 984.25,950 1027.56,950 940.95,993.31 984.25,993.31
GPIO18: J7.2 U1.29 | length 927
  Top Layer w8: U1.29 1132.75,847.64 1151.39,829 1564.7,829 J7.2
GPIO19: J7.3 U1.30 | length 892.1
  Top Layer w8: U1.30 1142.61,863.39 1157,849 1644.7,849 J7.3
GPIO20: J7.4 U1.31 | length 856.8
  Top Layer w8: U1.31 1149.87,879.13 1161,868 1725.31,868 J7.4@1899.61,693.7
GPIO21: J7.5 U1.32 | length 821.9
  Top Layer w8: U1.32 1157.12,894.88 1164,888 1805.31,888 J7.5@1899.61,793.7
GPIO26: J8.5 U1.38 | length 779.9
  Top Layer w6: U1.38 1162.63,989.37 1169,983 1894,983 J8.5
GPIO27: J8.4 U1.39 | length 809.5
  Top Layer w6: U1.39 1144.12,1005.12 1155,1016 1752,1016 1821,1085 J8.4
HC12_RX: J3.4 U1.3 | length 814.3
  Top Layer w6: J3.4 328.05,1077.95 398,1008 805,1008 817.87,1020.87 U1.3
HC12_SET: J3.5 U1.17 | length 1440.6
  Top Layer w6: J3.5 68.9,858.1 v1(123,804) ; v1(898,751) 913.39,766.39 U1.17
  Bottom Layer w6: v1(123,804) 123,515 138,500 423,500 674,751 v1(898,751)
HC12_TX: J3.3 U1.2 | length 845.7
  Top Layer w6: J3.3 261.05,1177.95 411,1028 798,1028 806.61,1036.61 U1.2
NetC17_1: C17.1 R9.1 Y1.2 | length 480.4
  Top Layer w6: R9.1 994.75,564 1001.05,557.7 1001.05,556.86 1068.02,489.88 1068.02,435.04 1107.22,395.84 C17.1
QSPI_CSn: R7.1 R8.2 U1.56 U2.1 | length 724
  Top Layer w6: U2.1@554,1193.32 U2.1@554,1175.6 ; R7.1 513.9,1109 R8.2 512.9,1134.5 U2.1@554,1175.6 ; U1.56 881.89,1098.62 849.51,1131 573,1131 554,1150 U2.1@554,1175.6
QSPI_SCLK: U1.52 U2.6 | length 709.4
  Top Layer w6: U2.6 656,1484.68 656,1526 672,1542 799,1542 861,1480 861,1202 944.88,1118.12 U1.52
QSPI_SD0: U1.53 U2.5 | length 618
  Top Layer w6: U2.5 706,1484.68 706,1521 711,1526 783,1526 843,1466 843,1201 929.13,1114.87 U1.53
QSPI_SD1: U1.55 U2.2 | length 387.9
  Top Layer w6: U2.2@614.23,1185.08 U2.2 605,1153 615,1143 862,1143 897.28,1107.72 897.28,1085.69 U1.55
QSPI_SD2: U1.54 U2.3 | length 340.2
  Top Layer w6: U2.3 656,1193.32 656,1158 659.5,1154.5 871.5,1154.5 913.39,1112.61 U1.54
QSPI_SD3: U1.51 U2.7 | length 804.3
  Top Layer w6: U2.7 605,1530 635,1560 816,1560 879,1497 879,1203 960.63,1121.37 U1.51
SWCLK: J5.1 U1.24 | length 1398.9
  Top Layer w6: J5.1 1017.09,210 1335,210 1444,319 1444,457 1346,555 1224,555 1037,742 1037,766.82 1023.62,780.2 U1.24
SWD: J5.3 U1.25 | length 1223.5
  Top Layer w6: U1.25 1039.37,781.42 1049,771.79 1049,749 1227,571 1355,571 1461,465 1461,313 1344,196 1203.09,196 J5.3
USB-D_N: J1.2 R6.1 TP4.1 | length 671.5
  Top Layer w8: 1007.87,1691 1009.84,1692.97 J1.2 1009.89,1737.06 v1(1009.89,1784.92)
  Top Layer w16.87: 1007.87,1691 1007.87,1477.36 1039.43,1445.79 1039.43,1215.5 1049.32,1205.61 1054.13,1205.61 1055,1204.75 R6.1
  Bottom Layer w8: v1(1009.89,1784.92) 1013.14,1784.92 1023.79,1795.57 1024.7,1795.57 1031,1801.86 TP4.1
USB-D_NX: R6.2 U1.46 | length 95.2
  Top Layer w8: U1.46 1039.37,1157.62 1055,1173.25 R6.2
USB-D_P: J1.3 R5.1 TP3.1 | length 699.9
  Top Layer w8: v1(978,1785.25) 978,1782 983.77,1776.23 983.77,1759.58 984.15,1759.21 984.25,1759.21 984.25,1692.75 986,1691
  Top Layer w16.87: 986,1691 986,1468.3 1017.57,1436.73 1017.57,1215.5 1007.68,1205.61 1002.87,1205.61 1002,1204.75 R5.1
  Bottom Layer w8: TP3.1 938,1792 946,1784 976.75,1784 v1(978,1785.25)
USB-D_PX: R5.2 U1.47 | length 97.7
  Top Layer w8: R5.2 1002,1173.25 1023.62,1151.63 U1.47
USB_BOOTn: J2.1 R8.1 | length 207.7
  Top Layer w6: J2.1 450,1229 483.1,1195.9 R8.1
VBUS: D1.2 J1.1 TP1.1
VSYS: C2.1 C18.1 D1.1 IC1.3 J4.4 J6.1 TP2.1 | length 2651.8
  Bottom Layer w20: v1(253,547) 194,547 155,586 155,791 319,955 319,1467 238,1548 238,1632 326,1720 536,1720 754,1938 1418,1938 J6.1
  other v1: 190,551
XIN: C16.1 U1.20 Y1.1 | length 718.4
  Top Layer w6: C16.1 607.14,396.7 Y1.1 869.66,396.7 908,435.04 908,687 960.63,739.63 U1.20
XOUT: R9.2 U1.21 | length 281.2
  Top Layer w6: R9.2 963.25,564 934,593.25 934,689 976.38,731.38 U1.21
pads on no net: IC1.2 J1.4 J4.5 J4.6 U1.4 U1.5 U1.8 U1.9 U1.11 U1.12 U1.13 U1.14 U1.15 U1.16 U1.18 U1.26 U1.27 U1.28 U1.34 U1.35 U1.36 U1.37 U1.40 U1.41

## Polygon pours and split planes (outlines as drawn)
VSYS on Top Layer "VSYS_L01_P067" (solid, pour order 67): 1421.02,1376 1536,1376 1536,1969 1430,1969 1430,1687 1422.33,1669.04 1417.22,1504.64
GND on Top Layer "GND_L01_P070" (solid, pour order 70): 1985,882 1957,910 1839,910 1784,965 1141,965 1141,1026 1148,1033 1249.16,1033 1244.48,1091 1208,1091 1208,1106 1208,1128 1239,1159 1430.59,1159 1698,1159 1778,1239 1778,1375 1852,1449 2000,1449
GND on Top Layer "GND_L01_P074" (solid, pour order 74): 0,0 0,2022 2069,2022 2071,2020 2071,0
VSYS on Top Layer "VSYS_L01_P069" (solid, pour order 69): 173,610.5 173,503 367,503 367,609.37
VBUS on Top Layer "VBUS_L01_P068" (solid, pour order 68): 1030,1743 1030,1621 1409,1621 1410,1622 1399,1633 1399,1802 1320,1802 1190,1672 1067,1672 1067,1743
3V3_REG on Top Layer "3V3_REG_L01_P066" (solid, pour order 66): 1670,1235 1281.53,1235 1190,1138 1165,1148 1165,1130.81 1102,1081.3 1102,1052.59 1208,1051.07 1208,1128 1239,1159 1670,1159
3V3_REG on Top Layer "3V3_REG_L01_P065" (solid, pour order 65): 1102,1087.04 1149,1087.04 1149,1051.98 1102,1052.59
3V3_REG on Top Layer "3V3_REG_L01_P064" (solid, pour order 64): 800,1118 867,1118 867,1054.58 800,1055.46
1V1_REG on Top Layer "1V1_REG_L01_P063" (solid, pour order 63): 1031,1058 1031,1049.95 893.91,1049.95 893.91,852 1037,852 1037,883 918,883 918,1019 1056.68,1019 1056.68,1058
3V3_REG on Top Layer "3V3_REG_L01_P062" (solid, pour order 62): 1031,1058 876,1058 876,842 1092,842 1092,1058 1062.21,1058 1062.21,1019 1081,1019 1081,981 1051,981 1051,883 1017,883 1017,863 893.91,863 893.91,1040 1031,1040
GND on Bottom Layer "GND_L02_P072" (solid, pour order 72): 1274.3,1088.3 1210,1024 1051,1024 1048,1021 1048,968 1236,968 1328,1060
GND on Bottom Layer "GND_L02_P071" (solid, pour order 71): 2017,1454 2015,1456 1776,1456 1776,881 1777,880 1778,881 2018,881
GND on Bottom Layer "GND_L02_P073" (solid, pour order 73): 0,0 0,2021 3,2024 2047,2024 2047,3 2044,0

## Silkscreen, mask and mechanical layers (free items; w line width, h text height)
Top Overlay:
  text "GND" at 1182,1898 h45
  text "USB" at 623,1883 h45
  text "VSYS" at 1554,1833 h45
  text "3V3" at 92,1457 h45 r90
  text "3V3" at 1517,1295 h45
  text "GND" at 146,1255 h45
  text "FLASH" at 793,1245 h40 r90
  text "BOOTSEL" at 380,1160 h45 r90
  text "TX" at 144,1157 h45
  text "RX" at 149,1055 h45
  text "ADC" at 1781,1045 h45 r270
  text "SET" at 146,959 h45
  text "GPIO" at 1783,492 h45 r270
  text "FLIGHT CONTRL" at 16,364 h42.5
  text "12 MHZ" at 861,234 h45
  text "DEBUG" at 601,57 h45
Bottom Overlay:
  region: 3025 vertices and 2 holes, not listed, extent 794.41,1181.58 1188.32,1700.45
  text "REV. 0.1" at 424,1837 h45
  text "AGND" at 1831,1358 h45
  text "AGND" at 1831,1258 h45
  text "VREF" at 1831,1151 h45
  text "GP27" at 1831,1060 h45
  text "GP26" at 1831,962 h45
  text "GP21" at 1831,768 h45
  text "GP20" at 1831,669 h45
  text "GP19" at 1831,569 h45
  text "GP18" at 1831,469 h45
  text "GND" at 1692.96,403.72 h45
  text "Samuel Fox - 2024 / Pico to CRSF Receiver" at 1434.5,153 h45
Mechanical 1:
  lines w0: 0,196.85 ccw(c196.85,196.85) 196.85,0 ; 0,1771.65 cw(c196.85,1771.65) 196.85,1968.5 ; 1771.65,0 ccw(c1771.65,196.85) 1968.5,196.85 ; 1771.65,1968.5 cw(c1771.65,1771.65) 1968.5,1771.65